# Altium PCB HomeLight_230722.PcbDoc
Units mil, origin at the board's own origin, x right, y up, seen from the top; angles counter-clockwise.
Board outline 3937.01 x 3937.01 mil, 2 copper layers (Top Layer, Bottom Layer); 110 components, 111 nets, 393 pads, 222 vias.
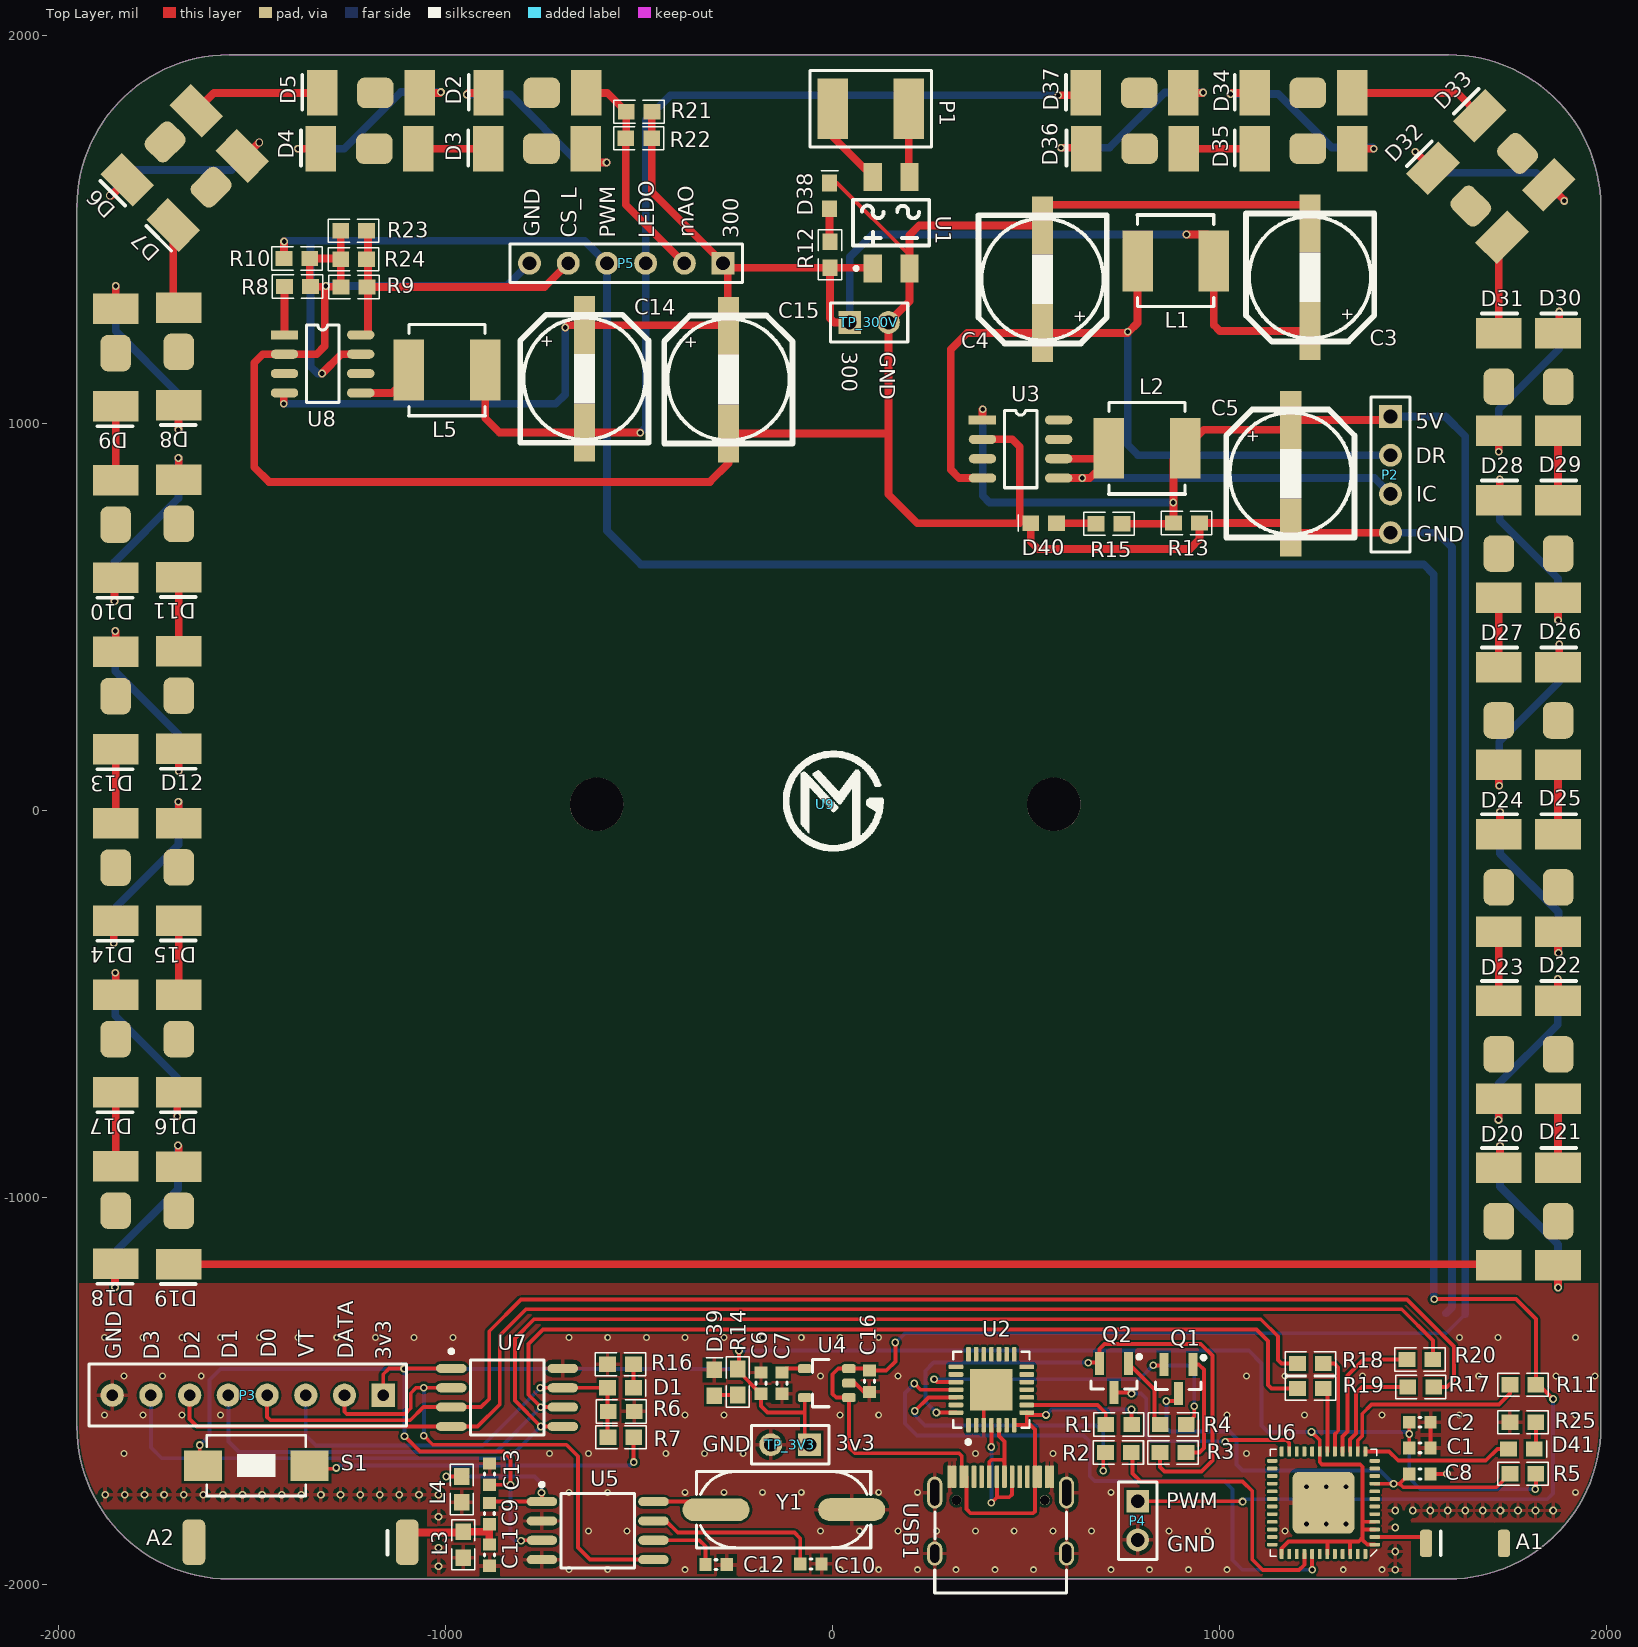
[diagram p0: Top Layer view]
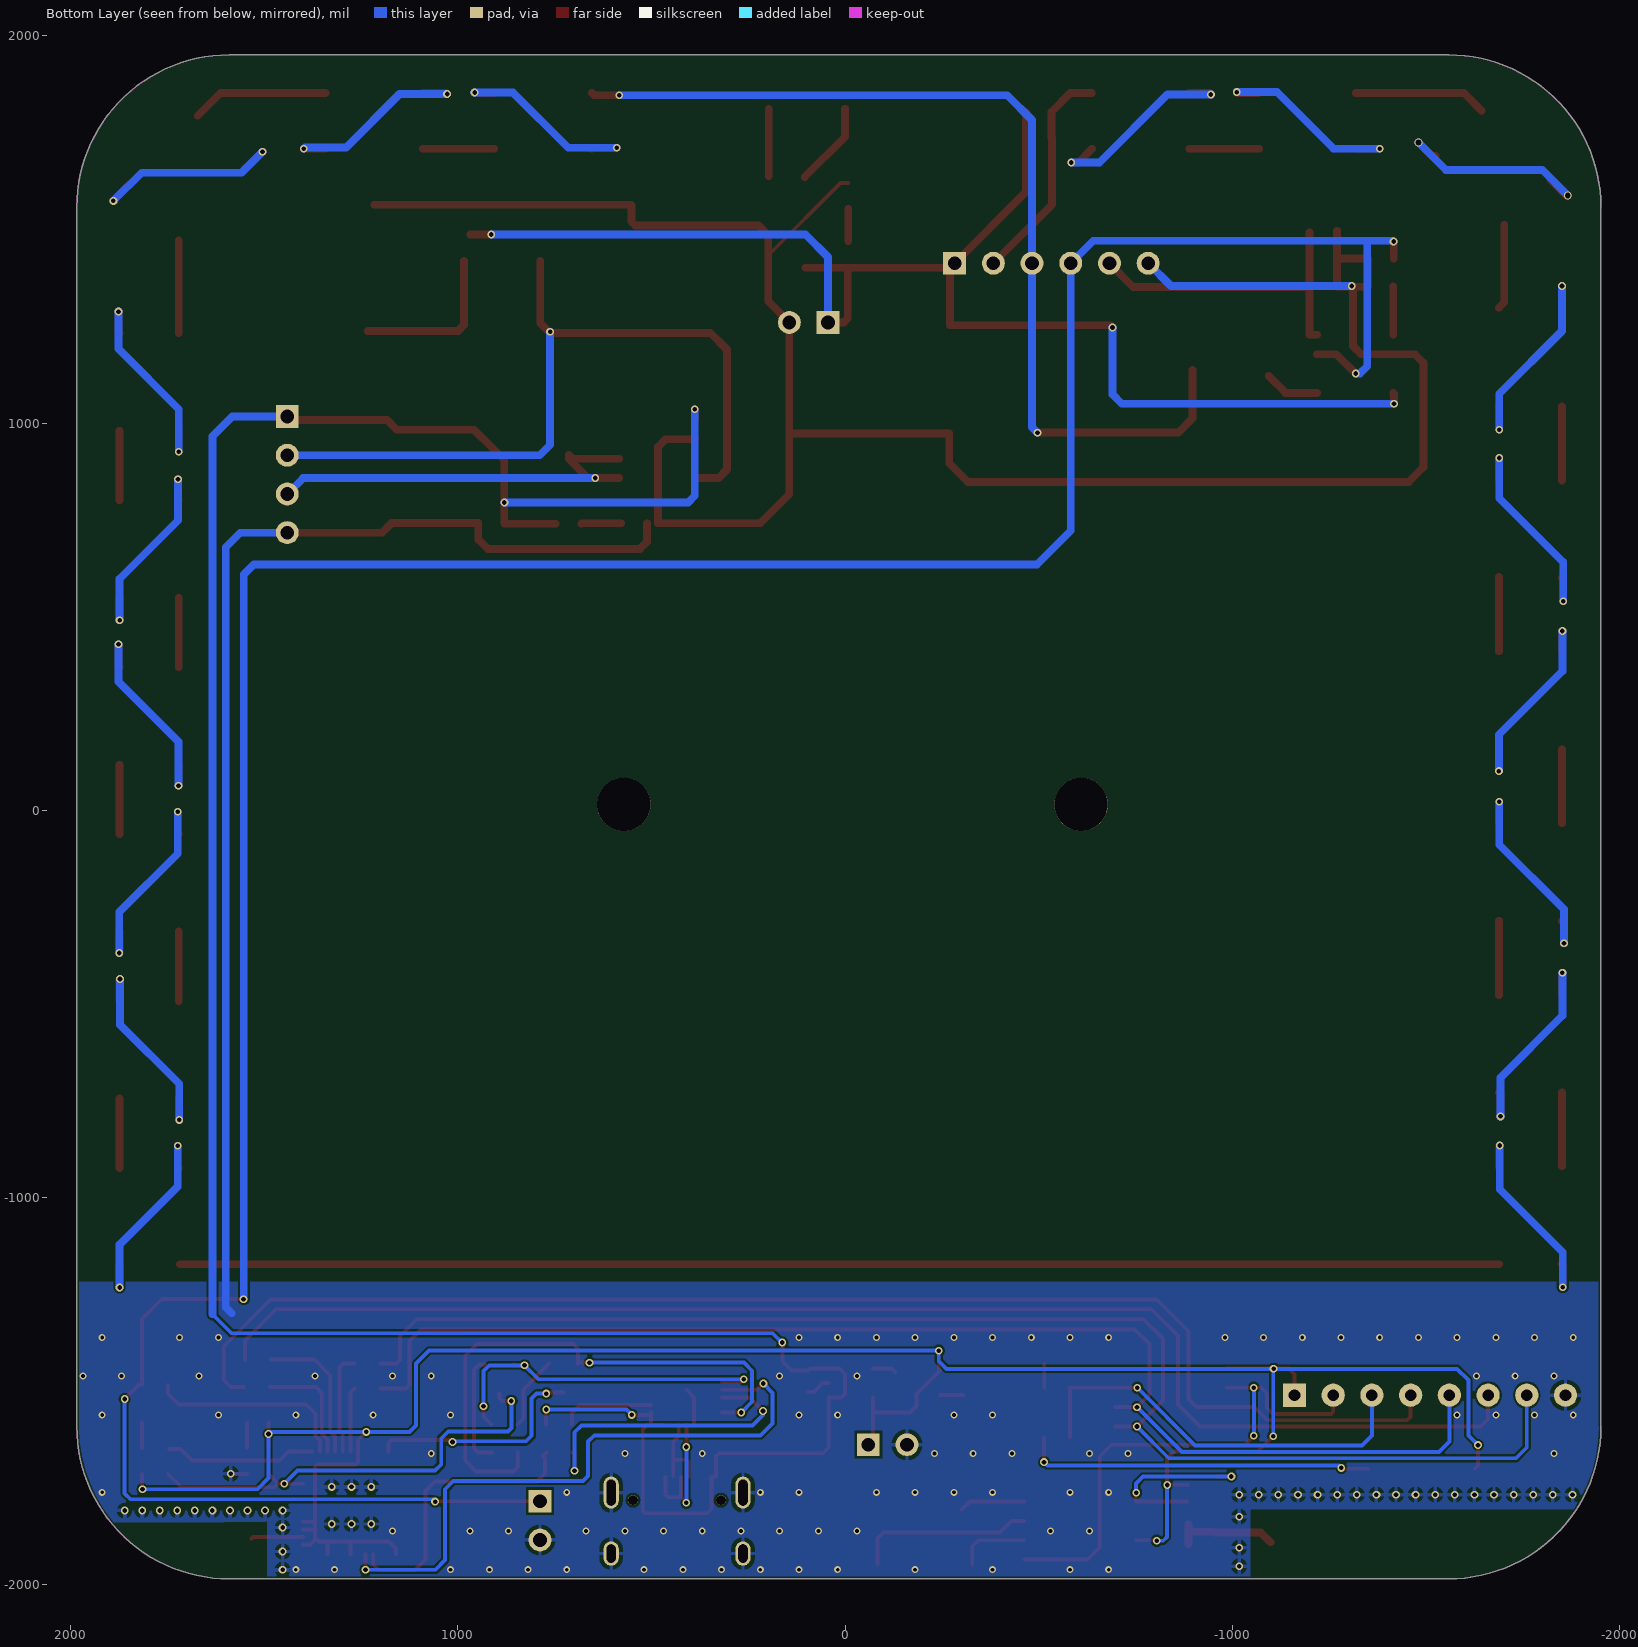
[diagram p1: Bottom Layer view, seen from below]

## Layer stack, top to bottom
Top Solder: solder mask 0.4, Solder Resist, Dk 3.5
Top Layer: signal copper 1.4
Dielectric 1: dielectric 12.6, FR-4, Dk 4.8
Bottom Layer: signal copper 1.4
Bottom Solder: solder mask 0.4, Solder Resist, Dk 3.5

## Board outline
-1952.47,-1591.98 -1952.47,1557.63 cw(c-1558.77,1557.63) -1558.77,1951.33 1590.84,1951.33 cw(c1590.84,1557.63) 1984.54,1557.63 1984.54,-1591.98 cw(c1590.84,-1591.98) 1590.84,-1985.68 -1558.77,-1985.68 cw(c-1558.77,-1591.98)

## Design rules (kind name [scope] priority, off if disabled: settings)
Clearance [All] p1: gap=6
MinimumSolderMaskSliver [All] p1: minsoldermaskwidth=4
PolygonConnect [All] p1: connectstyle=Relief reliefconductorwidth=10 reliefentries=4 polygonreliefangle="90 Angle" airgapwidth=10
RoutingVias [All] p1: holewidth=12 width=20 viastyle="Through Hole" minholewidth=8 minwidth=16 maxholewidth=28 maxwidth=50
SilkToSolderMaskClearance [IsPad] p1: minsilkscreentomaskgap=0 clearancetoexposedcopper=TRUE
SolderMaskExpansion [All] p1: expansion=4
Width [All] p1: maxlimit=100 minlimit=4 preferedwidth=10
27 further rules are at their usual default settings.

## Components (designator, comment, footprint, x,y, rotation, side; value= is the part's Value field where it differs from the comment)
A1 "ANT" ANT5020R2400 1633,-1894 r0 top
A2 "ANT" ANT15030R433 -1099,-1891 r180 top
C1 "10uF" 0603-2 1517,-1647 r180 top
C2 "0.1uF" 0603-2 1517,-1581 r180 top
C3 "Cap Pol" SMD-EC-F8 1233,1238 r90 top
C4 "Cap Pol" SMD-EC-F8 542,1233 r90 top
C5 "Cap Pol" SMD-EC-F8 1183,1008 r270 top
C6 "10uF" 0603-2 -185,-1480 r270 top
C7 "10nF" 0603-2 -131,-1480 r90 top
C8 "1uF" 0603-2 1517,-1715 r0 top
C9 "Cap" 0603-2 -887,-1817 r90 top
C10 "Cap" 0603-2 -56,-1947 r180 top
C11 "Cap" 0603-2 -886,-1924 r270 top
C12 "Cap" 0603-2 -301,-1949 r180 top
C13 "Cap" 0603-2 -886,-1715 r90 top
C14 "Cap Pol" SMD-EC-F8 -641,1253 r270 top
C15 "Cap Pol" SMD-EC-F8 -269,1251 r270 top
C16 "Cap" 0603-2 95,-1475 r270 top
D1 "LED0" LED_0603 -548,-1492 r0 top
D2 "LED0" LED-5730 -763,1853 r180 top
D3 "LED0" LED-5730 -764,1709 r180 top
D4 "LED0" LED-5730 -1196,1709 r180 top
D5 "LED0" LED-5730 -1193,1853 r180 top
D6 "LED0" LED-5730 -1733,1718 r225 top
D7 "LED0" LED-5730 -1614,1601 r225 top
D8 "LED0" LED-5730 -1689,1172 r270 top
D9 "LED0" LED-5730 -1852,1169 r270 top
D10 "LED0" LED-5730 -1852,726 r270 top
D11 "LED0" LED-5730 -1689,728.2 r270 top
D12 "LED0" LED-5730 -1689,284.4 r270 top
D13 "LED0" LED-5730 -1852,283 r270 top
D14 "LED0" LED-5730 -1852,-160 r270 top
D15 "LED0" LED-5730 -1689,-159.4 r270 top
D16 "LED0" LED-5730 -1689,-603.2 r270 top
D17 "LED0" LED-5730 -1852,-603 r270 top
D18 "LED0" LED-5730 -1852,-1046 r270 top
D19 "LED0" LED-5730 -1689,-1047 r270 top
D20 "LED0" LED-5730 1721,-1050 r90 top
D21 "LED0" LED-5730 1874,-1050 r90 top
D22 "LED0" LED-5730 1874,-618.8 r90 top
D23 "LED0" LED-5730 1721,-618.8 r90 top
D24 "LED0" LED-5730 1721,-187.6 r90 top
D25 "LED0" LED-5730 1874,-187.6 r90 top
D26 "LED0" LED-5730 1874,243.6 r90 top
D27 "LED0" LED-5730 1721,243.6 r90 top
D28 "LED0" LED-5730 1721,674.8 r90 top
D29 "LED0" LED-5730 1874,674.8 r90 top
D30 "LED0" LED-5730 1874,1106 r90 top
D31 "LED0" LED-5730 1721,1106 r90 top
D32 "LED0" LED-5730 1640,1569 r135 top
D33 "LED0" LED-5730 1761,1705 r135 top
D34 "LED0" LED-5730 1216,1853 r180 top
D35 "LED0" LED-5730 1216,1709 r180 top
D36 "LED0" LED-5730 781,1709 r180 top
D37 "LED0" LED-5730 780,1853 r180 top
D38 "LED0" LED_0603 -8,1587 r90 top
D39 "LED0" LED_0603 -306,-1479 r90 top
D40 "LED0" LED_0603 545,741 r180 top
D41 "LED0" LED_0603 1779.07,-1650 r0 top
L1 "Inductor" CD54 886,1419 r180 top
L2 "Inductor" CD54 812,935 r0 top
L3 "Inductor" 0603-1 -954,-1897.46 r90 top
L4 "Inductor" 0603-1 -958,-1754.46 r90 top
L5 "Inductor" CD54 -996,1137 r0 top
P1 "Header 2" HDR2X1_焊接版 0,1812 r0 top
P2 "Header 4" HDR4X1_2.54 1441,1017 r270 top
P3 "Header 8" HDR8X1_2.54 -1161,-1511 r180 top
P4 "Header 2" HDR2X1_2.54 788,-1785 r270 top
P5 "Header 6" HDR6X1_2.54 -283,1413 r180 top
Q1 "S8050" SOT-23 893,-1469 r270 top
Q2 "S8050" SOT-23 727,-1467 r270 top
R1 "10K" 0603-1 739,-1587 r180 top
R2 "200R" 0603-1 738,-1659 r180 top
R3 "12K" 0603-1 879,-1659 r0 top
R4 "12K" 0603-1 880,-1587 r180 top
R5 "10K" 0603-1 1783,-1714 r180 top
R6 "Res1" 0603-1 -546,-1553 r0 top
R7 "Res1" 0603-1 -547,-1620 r180 top
R8 "Res1" 0603-1 -1382.46,1353 r180 top
R9 "Res1" 0603-1 -1236.42,1351.39 r0 top
R10 "Res1" 0603-1 -1384,1425 r180 top
R11 "Res1" 0603-1 1783,-1484 r180 top
R12 "12K" 0603-1 -7,1435 r270 top
R13 "12K" 0603-1 914,742 r0 top
R14 "12K" 0603-1 -245,-1477 r90 top
R15 "12K" 0603-1 714,740 r0 top
R16 "Res1" 0603-1 -548,-1431 r180 top
R17 "Res1" 0603-1 1519,-1490 r0 top
R18 "Res1" 0603-1 1234,-1429 r180 top
R19 "Res1" 0603-1 1234,-1494 r180 top
R20 "Res1" 0603-1 1517,-1419 r0 top
R21 "Res1" 0603-1 -500,1804 r0 top
R22 "Res1" 0603-1 -501,1736 r0 top
R23 "Res1" 0603-1 -1237.46,1497 r0 top
R24 "Res1" 0603-1 -1237.46,1423 r0 top
R25 "Res1" 0603-1 1783,-1581 r0 top
S1 "SW-PB" SW_PB2_A1 -1491,-1693 r270 top
TP_3V3 "Header 2" HDR2X1_2.54 -60,-1639 r180 top
TP_300V "Header 2" HDR2X1_2.54 44,1260 r0 top
U1 "MBXS" MBXS 103.93,1399.76 r90 top
U2 "CP2102" QFN-28 410,-1497 r90 top
U3 "BP85226D" BP85226-BP2881 387,1008 r0 top
U4 "ME6211C33" SOT23-5 -17,-1480 r180 top
U5 "RF211A" SOIC-8 -607,-1861 r0 top
U6 "ESP32_SIP" QFN-48_7X7 1268,-1789 r180 top
U7 "RF211A_MCU05" SOIC-8 -841,-1517 r0 top
U8 "BP2881X" BP85226-BP2881 -1416,1228 r0 top
U9 "logo_MXJ" logo_MXJ -19,15 r0 top locked
USB1 "Type-C" Type-C-TOP 434,-1821 r270 top
Y1 "XTAL" X-SM49 -126,-1807 r180 top

## Footprints (in the part's own frame and the unit in brackets; to place one, negate y for a bottom-side part, rotate by r counter-clockwise, add the part's x,y. Pads: shape width x height; smd on the part's side, far side on the other; paste and mask are expansions set on the pad)
0603-1 [mm] "贴片带丝印"
  rect 1.1x1 smd: 1(-0.85,0) 2(0.85,0)
  silkscreen extent -1.65,-0.76 1.65,0.76, body extent -1.14,-0.38 1.14,0.38, height 1
0603-2 [mm] "贴片无丝印"
  rect 0.8x0.85 smd: 1(-0.7,0) 2(0.7,0)
  silkscreen extent -0.07,-0.33 0.07,0.33, body extent -0.87,-0.47 0.87,0.47, height 0.85
ANT5020R2400 [mm] "5x2mm,2.4G陶瓷天线"
  rrect50% 0.8x1.8 smd: 1(-2.54,0) ""(2.563,0)
  silkscreen extent -1.57,-0.76 -1.57,0.79, body extent -2.57,-0.91 2.54,0.94, height 1.32
ANT15030R433 [mm] "15x3mm,433M陶瓷天线"
  rrect50% 1.5x3 smd: 1(0,0) ""(14,0)
  silkscreen extent 1.3,-0.75 1.3,0.8
BP85226-BP2881 [mm]
  rect 1.8x0.6 smd: 1(0,0)
  oval 1.8x0.6 smd: 2(0,-1.27) 3(0,-2.54) 4(0,-3.81) 5(5,-3.81) 6(5,-2.54) 7(5,-1.27) 8(5,0)
  silkscreen extent 1.43,-4.44 3.57,0.64
CD54 [mm] "电感封装"
  rect 2x4 smd: 1(-2.5,0) 2(2.5,0)
  silkscreen extent -2.5,-3 2.5,3
HDR2X1_2.54 [mm] "Connector; Header; 2 Position; 2.54mm"
  rect 1.5x1.5 hole 0.9: 1(0,0)
  round 1.5 hole 0.9: 2(2.54,0)
  silkscreen extent -1.27,-1.27 3.81,1.27
HDR2X1_焊接版 [mm] "用于焊接裸露导线"
  rect 2x4 smd: 1(0,0) 2(5,0)
  silkscreen extent -1.5,-2.5 6.5,2.5
HDR4X1_2.54 [mm] "Connector; Header; 4 Position"
  rect 1.5x1.5 hole 0.9: 1(0,0)
  round 1.5 hole 0.9: 2(2.54,0) 3(5.08,0) 4(7.62,0)
  silkscreen extent -1.27,-1.27 8.89,1.27
HDR6X1_2.54 [mm] "Connector; Header; 4 Position"
  rect 1.5x1.5 hole 0.9: 1(0,0)
  round 1.5 hole 0.9: 2(2.54,0) 3(5.08,0) 4(7.62,0) 5(10.16,0) 6(12.7,0)
  silkscreen extent -1.27,-1.27 13.97,1.27
HDR8X1_2.54 [mil]
  rect 60x60 hole 30: 1(0,0)
  round 60 hole 30: 2(100,0) 3(200,0) 4(300,0) 5(400,0) 6(500,0) 7(600,0) 8(700,0)
  silkscreen extent -60,-80 760,80
LED-5730 [mm] "贴片二极管"
  rrect50% 2.4x2 smd: 0(-0.3,0)
  rect 2x3 smd: 1(-3.2,0) 2(3.2,0)
  silkscreen extent 4.5,-1.19 4.5,1.1
LED_0603 [mm] "带丝印层"
  rect 1.1x1 smd: 1(-0.85,0) 2(0.85,0)
  silkscreen extent 1.65,-0.56 1.65,0.53, body extent -1.14,-0.38 1.14,0.38, height 1
logo_MXJ [mil] "直径16mm"
  silkscreen extent -109,-120 151,139
MBXS [mm] "整流桥MB1S-MB10S"
  rect 1.84x1.2 smd: 1(0,0) 2(0,-2.4) 3(6,-2.4) 4(6,0)
  silkscreen extent -0.1,-3.7 4.5,1.3
QFN-28 [mil]
  rrect50% 38x12 smd mask+5: 1(-91.5,59.06) 2(-91.5,39.37) 3(-91.5,19.69) 4(-91.5,0) 5(-91.5,-19.68) 6(-91.5,-39.37) 7(-91.5,-59.06) 15(91.5,-59.06) 16(91.5,-39.37) 17(91.5,-19.68) 18(91.5,0) 19(91.5,19.69) 20(91.5,39.37) 21(91.5,59.06)
  rrect50% 12x38 smd mask+5: 8(-59.06,-91.5) 9(-39.37,-91.5) 10(-19.68,-91.5) 11(0,-91.5) 12(19.69,-91.5) 13(39.37,-91.5) 14(59.06,-91.5) 22(59.06,91.5) 23(39.37,91.5) 24(19.69,91.5) 25(0,91.5) 26(-19.68,91.5) 27(-39.37,91.5) 28(-59.06,91.5)
  rect 106.3x110.24 smd: 29(0,0)
  silkscreen extent -140,-98 98,98, body extent -98,-98 98,98, height 35
QFN-48_7X7 [mm]
  rrect20% 4.064x4.064 smd: 0(0,0)
  rrect50% 0.675x0.25 smd: 1(-3.363,2.75) 2(-3.363,2.25) 3(-3.363,1.75) 4(-3.363,1.25) 5(-3.363,0.75) 6(-3.363,0.25) 7(-3.363,-0.25) 8(-3.363,-0.75) 9(-3.363,-1.25) 10(-3.363,-1.75) 11(-3.363,-2.25) 12(-3.363,-2.75) 25(3.363,-2.75) 26(3.363,-2.25) 27(3.363,-1.75) 28(3.363,-1.25) 29(3.363,-0.75) 30(3.363,-0.25) 31(3.363,0.25) 32(3.363,0.75) 33(3.363,1.25) 34(3.363,1.75) 35(3.363,2.25) 36(3.363,2.75)
  rrect50% 0.25x0.675 smd: 13(-2.75,-3.363) 14(-2.25,-3.363) 15(-1.75,-3.363) 16(-1.25,-3.363) 17(-0.75,-3.363) 18(-0.25,-3.363) 19(0.25,-3.363) 20(0.75,-3.363) 21(1.25,-3.363) 22(1.75,-3.363) 23(2.25,-3.363) 24(2.75,-3.363) 37(2.75,3.363) 38(2.25,3.363) 39(1.75,3.363) 40(1.25,3.363) 41(0.75,3.363) 42(0.25,3.363) 43(-0.25,3.363) 44(-0.75,3.363) 45(-1.25,3.363) 46(-1.75,3.363) 47(-2.25,3.363) 48(-2.75,3.363)
  silkscreen extent -3.5,-3.5 3.5,3.5, body extent -3.5,-3.5 3.5,3.5, height 1
SMD-EC-F8 [mm]
  rect 3.8x1.4 smd: 1(0,0) 2(7.051,0)
  silkscreen extent -0.69,-4.22 7.71,4.2
SOIC-8 [mm]
  oval 2x0.6 smd: 1(-3.658,1.905) 2(-3.658,0.635) 3(-3.658,-0.635) 4(-3.658,-1.905) 5(3.658,-1.905) 6(3.658,-0.635) 7(3.658,0.635) 8(3.658,1.905)
  silkscreen extent -3.78,-2.45 2.41,3.15
SOT23-5 [mm] "SOT23, 3-Leads, Body 3.1x3.0mm (max), Pitch 0.95mm, IPC Medium Density"
  rrect50% 0.889x0.6 smd: 1(-1.5,0.95) 2(-1.5,0) 3(-1.5,-0.95) 4(1.396,-0.95) 5(1.396,0.95)
  silkscreen extent -0.2,-1.55 0.9,1.55, body extent -1.48,-1.45 1.32,1.45, height 1.2
SOT-23 [mm]
  rect 1.5x0.6 smd: 1(-0.95,0.95) 2(-0.95,-0.95) 3(0.95,0)
  silkscreen extent -1.52,-1.5 0.7,1.78, body extent -1.16,-1.45 1.21,1.45, height 1
SW_PB2_A1 [mm] "实验室常用复位开关，白色"
  rect 2x2.5 smd: 1(0,3.556) 2(0,-3.444)
  silkscreen extent -2,-3.19 2,3.31, body extent -2.03,-3.18 2.03,3.3, height 1.2
Type-C-TOP [mm]
  round 0.65 hole 0.65: 0(-0.98,2.89) 0(-0.98,-2.89)
  oval 1.6x1 hole 0.6 slot 1.2 at 0 deg: 1(2.52,4.325) 2(2.52,-4.325)
  oval 2.1x1 hole 0.6 slot 1.7 at 0 deg: 3(-1.48,-4.325) 4(-1.48,4.325)
  rrect50% 1.5x0.3 smd: A1(-2.52,-3.35) A4(-2.52,-2.55) A5(-2.52,-1.25) A6(-2.52,-0.25) A7(-2.52,0.25) A8(-2.52,1.25) A9(-2.52,2.55) A12(-2.52,3.35) B1(-2.52,3.05) B4(-2.52,2.25) B5(-2.52,1.75) B6(-2.52,0.75) B7(-2.52,-0.75) B8(-2.52,-1.75) B9(-2.52,-2.25) B12(-2.52,-3.05)
  silkscreen extent -0.22,-4.33 5.12,4.33, body extent -2.57,-4.48 5.18,4.48, height 3.26
X-SM49 [mm] "贴片晶振"
  oval 4.4x1.5 smd: 1(4.45,0.004) 2(-4.45,-0.004)
  silkscreen extent -5.7,-2.5 5.72,2.5

## Part data
C1 C2 C6 C7 C8: library part Cap, "无极性电容"
C3 C4 C5 C14 C15: "极性电解电容"
C9 C10 C11 C12 C13 C16: "无极性电容"
D1 D2 D3 D4 D5 D6 D7 D8 D9 D10 D11 D12 D13 D14 D15 D16 D17 D18 D19 D20 D21 D22 D23 D24 D25 D26 D27 D28 D29 D30 D31 D32 D33 D34 D35 D36 D37 D38 D39 D40 D41: "发光二极管"
L1 L2 L3 L4 L5: "电感"
P1 P2 P4 P5 TP_3V3 TP_300V: "接插件"
P3: "Header, 8-Pin"
Q1 Q2: library part Triode-NPN, "NPN三极管"
R1 R2 R3 R4 R5 R12 R13 R14 R15: library part Res1, "贴片电阻"
R6 R7 R8 R9 R10 R11 R16 R17 R18 R19 R20 R21 R22 R23 R24 R25: "贴片电阻"
S1: "微动开关"
U1: "整流桥"
U2: "USBתTTL"
U3: library part BP85226, "开关电源驱动芯片"
U4: library part LP2992, "LDO"
U5: "315M无线接收芯片"
U6: library part ESP32-PICO
U7: "无线接收芯片的解码芯片"
U8: "PWM调光非隔离降压型LED恒流驱动芯片"
USB1: library part USB-Type-C-TOP
Y1: "晶振"

## Free pads (board coordinates)
  round 137.8 hole 137.8: 1(-609.55,15) 2(571.55,15)

## Via types
v1: diameter 20, hole 12, Top Layer to Bottom Layer, 126 vias
v2: diameter 18, hole 10, Top Layer to Bottom Layer, 94 vias
v3: diameter 20, hole 15, Top Layer to Bottom Layer, 2 vias

## Nets (pads, with @x,y where several pads share a name; then routed paths per layer and width w, separated by ;. In a path a pad name is that pad's centre, name@x,y a point inside that pad or via, vN(x,y) a via of type N, cw(c..) or ccw(c..) an arc to the next point about the centre after c; other vN are vias at no path point)
3V3: C1.2 C2.2 C6.2 C13.1 P3.1 R5.1 R14.2 S1.2 TP_3V3.1 U4.5 U5.3 U6.1 U6.3 U6.4 U6.19 U6.37 U6.43 U6.46 U7.1 | length 6382.3
  Top Layer w10: v1(-1635,-1640) -1635,-1692.59 S1.2@-1626.59,-1701 ; P3.1 -1161,-1457 -1146,-1442 U7.1 ; v1(-1106,-1617) -1066,-1657 -850,-1657 -832,-1675 v1(-832,-1743) -832.44,-1742.56 C13.1 ; v1(-805,-1887) -804,-1886 U5.3 ; v1(-242,-1396) -242,-1444.56 -245,-1447.56 C6.2 -185,-1539 -168,-1556 -71.94,-1556 ; U4.5 -71.94,-1556 ; TP_3V3.1 -71.94,-1627.06 -71.94,-1556 ; U6.37 1159.91,-1921.21 1159.91,-1907.09 1178,-1889 1359,-1889 1369,-1879 ; v1(1237,-1606) 1258.16,-1627.16 U6.19 1258.16,-1684.16 1264,-1690 1363,-1690 1369,-1696 1369,-1879 ; U6.43 1277.84,-1891 ; U6.46 1336.9,-1891 ; 1369.21,-1838.21 U6.4 ; 1369.9,-1857.9 U6.3 ; U6.1 1400.21,-1897.09 1381.09,-1897.09 1369,-1885 1369,-1879 ; C1.2 v1(1489.44,-1611.44) C2.2 ; v1(1815,-1754) 1816.46,-1752.54 R5.1
  Bottom Layer w10: v1(-1635,-1640) -1610,-1615 -1610,-1472 -1581,-1443 v1(-1107,-1443) ; v1(-1106,-1617) -1106,-1444 v1(-1107,-1443) ; v1(-832,-1743) -832,-1877 -822,-1887 v1(-805,-1887) ; v1(1815,-1754) 1518,-1754 1489.44,-1725.44 v1(1489.44,-1611.44) 1484,-1606 v1(1237,-1606) 1125,-1606 1108,-1589 1108,-1429 1075,-1396 v1(-242,-1396) -242,-1423 -262,-1443 v1(-1107,-1443)
300V: C3.1 C14.1 C15.1 L1.1 P5.1 R12.2 R21.2 R22.2 TP_300V.1 U1.1 U8.4 | length 4089.9
  Top Layer w20: v1(-1418,1050) -1418,1076 U8.4 ; v1(-691,1247) -685,1253 C14.1 -271,1253 -271,1401 P5.1@-271.54,1401.54 ; R21.2@-467.54,1803 R22.2 -467.54,1597.54 P5.1 P5.1@-271.54,1401.54 ; TP_300V.1 4,1260 -7,1271 R12.2 ; U1.1@102.16,1401.54 R12.2 ; v1(914,1487) L1.1@968,1487 ; L1.1 984.43,1253.57 1000,1238 C3.1 ; P5.1@-271.54,1401.54 R12.2
  Bottom Layer w20: v1(-1418,1050) -715,1050 -691,1074 v1(-691,1247) ; TP_300V.1 44,1429 102,1487 v1(914,1487)
CP_RX: U2.25 U6.41 | length 1635.8
  Top Layer w10: v1(211,-1481) 227,-1497 U2.25 ; U6.41 1238.47,-1961.47 v1(1239,-1962)
  Bottom Layer w10: v1(211,-1481) 187,-1505 187,-1584 218,-1615 648,-1615 664,-1631 664,-1720 677,-1733 1012,-1733 1033,-1754 1033,-1937 1058,-1962 v1(1239,-1962)
CP_TX: R2.1 U6.40 | length 745
  Top Layer w10: R2.1 781,-1668.54 775,-1674.54 775,-1713 796,-1734 1059,-1734 1084,-1759 1084,-1936 1111,-1963 1205,-1963 1218.79,-1949.21 U6.40
CS_LED: P5.5 R9.2 R23.2 R24.2 U8.8 | length 826.7
  Top Layer w20: U8.8 -1200,1228 R9.2@-1200,1351.39 ; R23.2@-1200,1493 R9.2@-1200,1351.39 ; P5.5 -744.61,1351.39 R9.2@-1200,1351.39
DRAIN: C4.1 L1.2 P2.2 U3.4 | length 2052.6
  Top Layer w20: U3.4 327,858 305,880 305,1190 348,1233 C4.1 v1@762,1233 ; v1@763.5,1234.5 787.57,1258.57 L1.2
  Bottom Layer w20: v1(762,1236) 762,944 789,917 P2.2
DTR: Q2.2 R3.1 U2.28 | length 1437
  Top Layer w10: v1(268,-1556) v1(268,-1556) U2.28 ; v1(660,-1427) 687,-1427 Q2.2 689.6,-1391.4 702,-1379 951,-1379 981,-1409 981,-1680 953,-1708 857,-1708 845.54,-1696.54 R3.1
  Bottom Layer w10: v1(268,-1556) 240,-1528 240,-1448 261,-1427 v1(660,-1427)
EN: C8.1 Q1.3 R5.2 U6.9 | length 1206.7
  Top Layer w10: v1(862,-1526) 886,-1526 893,-1519 Q1.3 ; U6.9 1464.65,-1739.79 ; C8.1@1488.44,-1714 C8.1 1464.65,-1739.79 ; R5.2 1714.54,-1749 1473.87,-1749 1464.65,-1739.79
  Bottom Layer w10: v1(862,-1526) 862,-1596 871,-1605 1025,-1605 1043,-1623 1043,-1690 1059,-1706 1414,-1706 v1@1449,-1741
  other v1: 1449,-1739.79
FLASH_CLK: U6.31
FLASH_CS: U6.25
FLASH_SD0: U6.27
FLASH_SD1: U6.33
FLASH_SD2: U6.30
FLASH_SD3: U6.32
GND: C1.1 C2.1 C3.2 C4.2 C5.2 C6.1 C7.1 C8.2 C10.1 C11.2 C12.1 C13.2 C15.2 C16.2 D38.2 D39.2 D40.2 L3.1 L4.1 P2.4 P3.8 P4.2 P5.6 R6.2 R8.1 R9.1 R10.1 R13.2 R16.2 R23.1 R24.1 R25.1 TP_3V3.2 TP_300V.2 U1.2 U2.3 U2.29 U3.2 U4.2 U5.2 U5.4 U6.0 U7.8 U8.2 USB1.1 USB1.2 USB1.3 USB1.4 USB1.A1 USB1.A12 USB1.B1 USB1.B12 Y1.2 | length 9490.1
  Top Layer w10: D38.2 11.54,1620.46 197,1435 U1.2@198.42,1435 ; U4.2 58,-1480 80.56,-1502.56 C16.2 ; U2.3 390.31,-1516.68 U2.29 ; C8.2 v1@1586,-1715 ; C1.1 C2.1
  Top Layer w20: v1@-1309,1352.43 -1270.93,1352.43 R24.1 R23.1 ; R24.1@-1272.93,1425 R10.1 -1350.54,1354.54 R8.1 -1348.43,1352.43 -1312,1352.43 -1312,1199 -1333,1178 U8.2 -1472,1178 -1494,1156 -1494,886 -1456,848 -317,848 -269,896 C15.2 140.41,973.41 ; U3.2 464,958 483,939 483,741 219,741 144,816 TP_300V.2 198.42,1314.42 U1.2 198.42,1435 198.42,1485.42 223.59,1510.59 C4.2 552,1520.59 552,1563 553,1564 C3.2@1216,1564 ; D40.2 511.54,693.46 530,675 923,675 947.46,699.46 R13.2 1171.41,742 C5.2 1196.41,717 P2.4
  Bottom Layer w20: v1(-1309,1354) -842,1354 P5.6 ; P2.4 1562,717 1600,679 1600,-1284 1584.5,-1299.5
  other v1: 1453,-1962 -1018,-1953 1453,-1915 -1018,-1905 1453,-1853 1224,-1844 1275,-1844 1326,-1844 -1018,-1825 1453,-1809 1498.33,-1809 1543.67,-1809 1589,-1809 1634.33,-1809 1679.67,-1809 1725,-1809 1770.33,-1809 1815.67,-1809 1861,-1809 -1879,-1768 -1828.35,-1768 -1777.71,-1768 -1727.06,-1768 -1676.41,-1768 -1625.77,-1768 -1575.12,-1768 -1524.47,-1768 -1473.82,-1768 -1423.18,-1768 -1372.53,-1768 -1321.88,-1768 -1271.24,-1768 -1220.59,-1768 -1169.94,-1768 -1119.3,-1768 -1068.65,-1768 -1018,-1768 1224,-1748 1275,-1748 1326,-1748 1587,-1714
  other v2: -681.06,-1961.94 -581.06,-1961.94 -381.06,-1961.94 -181.06,-1961.94 18.94,-1961.94 118.94,-1961.94 218.94,-1961.94 318.94,-1961.94 418.94,-1961.94 518.94,-1961.94 718.94,-1961.94 818.94,-1961.94 918.94,-1961.94 1018.94,-1961.94 1318.94,-1961.94 1418.94,-1961.94 -631.06,-1861.94 -531.06,-1861.94 -31.06,-1861.94 68.94,-1861.94 168.94,-1861.94 268.94,-1861.94 368.94,-1861.94 468.94,-1861.94 568.94,-1861.94 668.94,-1861.94 868.94,-1861.94 968.94,-1861.94 1168.94,-1861.94 -681.06,-1761.94 -581.06,-1761.94 -381.06,-1761.94 -281.06,-1761.94 -181.06,-1761.94 -81.06,-1761.94 118.94,-1761.94 218.94,-1761.94 718.94,-1761.94 1918.94,-1761.94 -1831.06,-1661.94 -731.06,-1661.94 -631.06,-1661.94 -431.06,-1661.94 -331.06,-1661.94 -231.06,-1661.94 368.94,-1661.94 568.94,-1661.94 1068.94,-1661.94 -1881.06,-1561.94 -1781.06,-1561.94 -1681.06,-1561.94 -1581.06,-1561.94 -381.06,-1561.94 -281.06,-1561.94 18.94,-1561.94 118.94,-1561.94 1018.94,-1561.94 1218.94,-1561.94 1418.94,-1561.94 1618.94,-1561.94 1918.94,-1561.94 -1831.06,-1461.94 -1731.06,-1461.94 -1631.06,-1461.94 -31.06,-1461.94 168.94,-1461.94 1068.94,-1461.94 1168.94,-1461.94 1368.94,-1461.94 1668.94,-1461.94 1868.94,-1461.94 1968.94,-1461.94 -1881.06,-1361.94 -1781.06,-1361.94 -1681.06,-1361.94 -1581.06,-1361.94 -1481.06,-1361.94 -1381.06,-1361.94 -1281.06,-1361.94 -1181.06,-1361.94 -1081.06,-1361.94 -981.06,-1361.94 -681.06,-1361.94 -581.06,-1361.94 -481.06,-1361.94 -381.06,-1361.94 -281.06,-1361.94 -181.06,-1361.94 -81.06,-1361.94 18.94,-1361.94 118.94,-1361.94 1618.94,-1361.94 1718.94,-1361.94 1918.94,-1361.94
GPIO0: Q2.3 U6.23 | length 588.8
  Top Layer w10: Q2.3 769.4,-1504.4 v1(772,-1507) ; v1(1014,-1632) 1019,-1627 1172,-1627 1179.42,-1634.42 U6.23
  Bottom Layer w10: v1(772,-1507) 797,-1507 810,-1520 810,-1616 824,-1630 1012,-1630 v1(1014,-1632)
GPIO2: U6.22
GPIO4: U6.24
GPIO5: U6.34
GPIO9: U6.28
GPIO10: U6.29
GPIO12: R19.1 U6.18 | length 167
  Top Layer w10: R19.1 1278,-1504.54 1278,-1656.46 U6.18
GPIO13: U6.20
GPIO14: R18.1 U6.17 | length 263.8
  Top Layer w10: R18.1 1296,-1429 1306,-1439 1306,-1603 1297.53,-1611.47 U6.17
GPIO15: U6.21
GPIO18: U6.35
GPIO19: U6.38
GPIO21: U6.42
GPIO22: U6.39
GPIO23: U6.36
GPIO25: R11.2 U6.14 | length 528.1
  Top Layer w10: U6.14 1356.58,-1628.04 1368,-1616.63 1368,-1559 1392,-1535 1721,-1535 1749.54,-1506.46 R11.2
GPIO26: R17.1 U6.15 | length 297.6
  Top Layer w10: U6.15 1336.9,-1625.1 1352,-1610 1352,-1505 1367,-1490 R17.1
GPIO27: R20.1 U6.16 | length 372.4
  Top Layer w10: U6.16 1317.21,-1617.79 1330,-1605 1330,-1460 1371,-1419 R20.1
GPIO32: U6.12
GPIO33: D41.1 U6.13 | length 391.5
  Top Layer w10: U6.13 1437.62,-1656.62 1461,-1680 1687,-1680 1717,-1650 D41.1
GPIO34: U6.10
GPIO35: U6.11
GPIO37: U6.6
GPIO38: U6.7
IC_GND: L2.1 P2.3 U3.5 U3.6 | length 1107.5
  Top Layer w20: U3.5 v1(645,858) 664,858 713.57,907.57 713.57,918 703.57,908 U3.6
  Bottom Layer w20: v1(645,858) 1400,858 P2.3
LED_MA: D2.1 P5.2 R21.1 R22.1 | length 576.6
  Top Layer w20: D2.1 -582.46,1853 R21.1 R22.1@-533.46,1737 ; R22.1 -534.46,1564.46 P5.2
NetA1_1: A1.1 U6.2 | length 134
  Top Layer w10: U6.2 1529.58,-1877.58 A1.1@1533,-1881
NetA2_1: A2.1 C9.1 C11.1 L3.2 | length 273.1
  Top Layer w20: A2.1 -1074,-1866 -956,-1866 L3.2 -888,-1864 ; C11.1@-887,-1895.44 C9.1
NetC7_2: C7.2 U4.4 | length 63.1
  Top Layer w10: C7.2 -121.16,-1442.6 U4.4
NetC9_2: C9.2 L4.2 U5.1 | length 473.4
  Top Layer w10: v1(-998,-1721) L4.2 ; C9.2@-883.56,-1786 U5.1 -751,-1764 v1(-752,-1763)
  Bottom Layer w10: v1(-998,-1721) -770,-1721 -752,-1739 v1(-752,-1763)
NetC10_2: C10.2 U5.7 | length 463.8
  Top Layer w10: U5.7 -430,-1836 -400,-1866 -99,-1866 -83.56,-1881.44 C10.2
NetC12_2: C12.2 U5.6 | length 188.4
  Top Layer w10: U5.6 -344,-1886 -328.56,-1901.44 C12.2
NetD1_2: D1.2 R16.1 | length 61
  Top Layer w10: D1.2 R16.1
NetD2_2: D2.2 D3.1 | length 560.5
  Top Layer w20: v1(-945,1849) -941,1853 D2.2 ; D3.1 -602.02,1673 v1(-584,1673)
  Bottom Layer w20: v1(-945,1849) -833,1849 -657,1673 v1(-584,1673)
NetD3_2: D3.2 D4.1 | length 180
  Top Layer w20: D4.1 D3.2
NetD4_2: D4.2 D5.1 | length 544.3
  Top Layer w20: v1(-1381,1709) D4.2 ; D5.1 -1014,1853 v1(-1012,1855)
  Bottom Layer w20: v1(-1381,1709) -1262,1709 -1116,1855 v1(-1012,1855)
NetD5_2: D5.2 D6.1 | length 344
  Top Layer w20: D6.1 -1598,1853 D5.2
NetD6_2: D6.2 D7.1 | length 563
  Top Layer w20: v3(-1867,1588) -1863,1588 D6.2 ; D7.1 -1515.92,1690.08 v3(-1481,1725)
  Bottom Layer w20: v3(-1867,1588) -1801,1654 -1552,1654 v3(-1481,1725)
NetD7_2: D7.2 D8.1 | length 219.8
  Top Layer w20: D7.2 -1703.08,1312.07 D8.1
NetD8_2: D8.2 D9.1 | length 560.5
  Top Layer w20: D9.1 v1(-1852,1354) ; v1(-1690,983) -1690,1045.02 D8.2
  Bottom Layer w20: v1(-1852,1354) -1852,1238 -1690,1076 v1(-1690,983)
NetD9_2: D9.2 D10.1 | length 191
  Top Layer w20: D10.1 D9.2
NetD10_2: D10.2 D11.1 | length 555.8
  Top Layer w20: v1(-1855,540) -1855,597.02 D10.2 ; v1(-1690,910) -1689,909 D11.1
  Bottom Layer w20: v1(-1855,540) -1855,641 -1690,806 v1(-1690,910)
NetD11_2: D11.2 D12.1 | length 191.8
  Top Layer w20: D12.1 D11.2
NetD12_2: D12.2 D13.1 | length 541.8
  Top Layer w20: v1(-1853,463) -1852,462 D13.1 ; v1(-1689,101) D12.2
  Bottom Layer w20: v1(-1853,463) -1853,359 -1689,195 v1(-1689,101)
NetD13_2: D13.2 D14.1 | length 191
  Top Layer w20: D14.1 D13.2
NetD14_2: D14.2 D15.1 | length 551.1
  Top Layer w20: v1(-1857,-344) -1857,-290.98 D14.2 ; v1(-1690,22) -1689,21 D15.1
  Bottom Layer w20: v1(-1857,-344) -1857,-256 -1690,-89 v1(-1690,22)
NetD15_2: D15.2 D16.1 | length 191.8
  Top Layer w20: D16.1 D15.2
NetD16_2: D16.2 D17.1 | length 558.2
  Top Layer w20: v1(-1853,-420) -1852,-421 D17.1 ; v1(-1693,-791) -1693,-733.18 D16.2
  Bottom Layer w20: v1(-1853,-420) -1853,-531 -1693,-691 v1(-1693,-791)
NetD17_2: D17.2 D18.1 | length 191
  Top Layer w20: D18.1 D17.2
NetD18_2: D18.2 D19.1 | length 550.2
  Top Layer w20: v1(-1854,-1232) -1854,-1173.98 D18.2 ; v1(-1691,-866) -1689,-868 D19.1
  Bottom Layer w20: v1(-1854,-1232) -1854,-1142 -1691,-979 v1(-1691,-866)
NetD19_2: D19.2 D20.1 | length 3407
  Top Layer w20: D19.2 D20.1@1718,-1172.98
NetD20_2: D20.2 D21.1 | length 543.4
  Top Layer w20: D20.2 1724,-921.02 v1(1724,-867) ; v1(1874,-1233) D21.1
  Bottom Layer w20: v1(1724,-867) 1724,-972 1874,-1122 v1(1874,-1233)
NetD21_2: D21.2 D22.1 | length 179.2
  Top Layer w20: D21.2 D22.1
NetD22_2: D22.2 D23.1 | length 540.2
  Top Layer w20: v1(1720,-800) 1721,-799 D23.1 ; v1(1873,-436) 1874,-437 D22.2
  Bottom Layer w20: v1(1720,-800) 1720,-707 1873,-554 v1(1873,-436)
NetD23_2: D23.2 D24.1 | length 179.2
  Top Layer w20: D23.2 D24.1
NetD24_2: D24.2 D25.1 | length 542.2
  Top Layer w20: D24.2 1724,-58.62 v1(1724,-4) ; D25.1 1874,-368 v1(1875,-369)
  Bottom Layer w20: v1(1724,-4) 1724,-112 1875,-263 v1(1875,-369)
NetD25_2: D25.2 D26.1 | length 179.2
  Top Layer w20: D25.2 D26.1
NetD26_2: D26.2 D27.1 | length 545.9
  Top Layer w20: D27.1 1721,64 v1(1722,63) ; D26.2 1877,372.58 v1(1877,429)
  Bottom Layer w20: v1(1722,63) 1722,177 1877,332 v1(1877,429)
NetD27_2: D27.2 D28.1 | length 179.2
  Top Layer w20: D27.2 D28.1
NetD28_2: D28.2 D29.1 | length 539.4
  Top Layer w20: D28.2 1723,802.78 v1(1723,855) ; v1(1874,491) D29.1
  Bottom Layer w20: v1(1723,855) 1723,749 1874,598 v1(1874,491)
NetD29_2: D29.2 D30.1 | length 179.2
  Top Layer w20: D29.2 D30.1
NetD30_2: D30.2 D31.1 | length 537.9
  Top Layer w20: v1(1721,926) D31.1 ; D30.2 1877,1234.98 v1(1877,1288)
  Bottom Layer w20: v1(1721,926) 1721,1036 1877,1192 v1(1877,1288)
NetD31_2: D31.2 D32.1 | length 239.8
  Top Layer w20: D31.2 D32.1@1721,1471.83
NetD32_2: D32.2 D33.1 | length 559.7
  Top Layer w20: v1(1505,1701) 1547.92,1658.08 D32.2 ; D33.1 1890,1576 v1(1890,1574)
  Bottom Layer w20: v1(1505,1701) 1559,1647 1817,1647 v1(1890,1574)
NetD33_2: D33.2 D34.1 | length 354.3
  Top Layer w20: D34.1 1613,1853 D33.2
NetD34_2: D34.2 D35.1 | length 547.7
  Top Layer w20: v1(1028,1850) 1031,1853 D34.2 ; D35.1 v1(1398,1709)
  Bottom Layer w20: v1(1028,1850) 1151,1850 1289,1712 1395,1712 v1(1398,1709)
NetD35_2: D35.2 D36.1 | length 183
  Top Layer w20: D36.1 D35.2
NetD36_2: D36.2 D37.1 | length 543.5
  Top Layer w20: v1(590,1711) 653.02,1711 D36.2 ; D37.1 956,1853 v1(957,1854)
  Bottom Layer w20: v1(590,1711) 715,1711 858,1854 v1(957,1854)
NetD38_1: D38.1 R12.1 | length 84.1
  Top Layer w20: R12.1@-8,1469.46 D38.1
NetD39_1: D39.1 R14.1 | length 61.8
  Top Layer w10: D39.1 -304,-1510.46 R14.1
NetD40_1: D40.1 R15.1 | length 102.5
  Top Layer w20: D40.1 679.54,741 R15.1
NetD41_2: D41.2 R25.2 | length 65.1
  Top Layer w10: D41.2@1816.46,-1646.07 R25.2
NetL5_1: L5.1 U8.5 | length 142.8
  Top Layer w20: U8.5 -1138,1078 L5.1@-1094.43,1121.57
NetP1_1: P1.1 U1.4 | length 219.1
  Top Layer w20: P1.1 0,1739.91 U1.4
NetP1_2: P1.2 U1.3 | length 174.4
  Top Layer w20: U1.3@196.85,1637.55 P1.2
NetQ1_1: Q1.1 R3.2 | length 288.2
  Top Layer w10: R3.2 948,-1659 959,-1648 959,-1445 945.6,-1431.6 Q1.1
NetQ2_1: Q2.1 R4.2 | length 191.4
  Top Layer w10: Q2.1 831,-1496.2 831,-1571.46 R4.2
NetR1_2: R1.2 U2.9 | length 242.4
  Top Layer w10: U2.9 684.63,-1536.37 705.54,-1557.28 R1.2
NetR2_2: R2.2 U2.26 | length 785.1
  Top Layer w10: v1(212,-1552) 247.31,-1516.68 U2.26 ; v1(699,-1706) 699,-1664.54 R2.2
  Bottom Layer w10: v1(212,-1552) 212,-1562 239,-1589 681,-1589 699,-1607 v1(699,-1706)
NetR7_1: R7.1 S1.1 | length 908.2
  Top Layer w10: S1.1@-1351,-1701 -1284,-1701 v1(-1282,-1699) ; v1(-514,-1684) -514,-1620.46 R7.1
  Bottom Layer w10: v1(-1282,-1699) -1276,-1693 -523,-1693 v1(-514,-1684)
NetR8_2: R8.2 U8.1 | length 124.9
  Top Layer w20: U8.1@-1415.93,1228.07 R8.2
NetU5_8: U5.8 Y1.1 | length 170.6
  Top Layer w10: U5.8 -322.37,-1786 Y1.1
OUT_LED: C14.2 D37.2 L5.2 P5.3 | length 2520.4
  Top Layer w20: L5.2 -897.57,1012.57 -860.41,975.41 C14.2 -497.41,975.41 v1(-497,975) ; v1(583,1847) 648.02,1847 D37.2
  Bottom Layer w20: v1(-497,975) -483,989 P5.3 -483,1783 -419,1847 v1(583,1847)
PWM_LED: P4.1 P5.4 R10.2 R11.1 U8.7 | length 7970.6
  Top Layer w10: P4.1 1058,-1785 v1(1059,-1786) ; v1(1554,-1263) 1765,-1263 1816.46,-1314.46 R11.1 1824,-1484 v1(1861,-1521)
  Top Layer w20: R10.2 -1417.46,1468.54 v1(-1417,1469) ; v1(-1319,1128) -1269,1178 U8.7
  Bottom Layer w10: v1(1059,-1786) 1065,-1780 1846,-1780 1861,-1765 v1(1861,-1521)
  Bottom Layer w20: v1(-1417,1469) -1415,1471 -1349,1471 ; v1(-1319,1128) -1330,1128 -1349,1147 -1349,1471 ; v1@1553,-1263 1553,609 1527,635 -496,635 -583,722 P5.4 -641,1471 -1349,1471
RTS: Q1.2 R4.1 U2.24 | length 927.8
  Top Layer w10: v1(262,-1470) 269.31,-1477.31 U2.24 ; v1(828,-1434) 853.2,-1434 Q1.2 ; R4.1 934,-1566.46 v1(934,-1540)
  Bottom Layer w10: v1(262,-1470) 792,-1470 v1(828,-1434) 919,-1434 934,-1449 v1(934,-1540)
SENSOR_VN: U6.8
SENSOR_VP: U6.5
SW_D0: P3.4 R17.2 U7.3 | length 3554.6
  Top Layer w10: P3.4 -1461,-1567 -1452,-1576 -1091,-1576 -1057,-1542 U7.3 -908,-1542 -887,-1521 -887,-1346 -805,-1264 1484,-1264 1605,-1385 1605,-1472 1587,-1490 R17.2
SW_D1: P3.5 R19.2 U7.6 | length 3351.9
  Top Layer w10: U7.6 v1(-754,-1542) -786,-1510 -786,-1379 -748,-1341 1095,-1341 1125,-1371 1125,-1485 1134,-1494 R19.2
  Bottom Layer w10: P3.5 -1561,-1631 -1534,-1658 -870,-1658 v1(-754,-1542)
SW_D2: P3.6 R20.2 U7.4 | length 3594
  Top Layer w10: P3.6 -1661,-1573 -1642,-1592 U7.4 -917,-1592 -860,-1535 -860,-1357 -792,-1289 1470,-1289 1550.46,-1369.46 R20.2
SW_D3: P3.7 R18.2 U7.5 | length 3624.5
  Top Layer w10: U7.5 v1(-754,-1592) -821,-1525 -821,-1365 -771,-1315 1106,-1315 1150,-1359 1150,-1420 1159,-1429 R18.2
  Bottom Layer w10: P3.7 -1761,-1646 -1733,-1674 -836,-1674 v1(-754,-1592)
SW_DATA: P3.2 U5.5 U7.2 | length 1357.3
  Top Layer w10: P3.2 -1261,-1554 -1255,-1560 -1105,-1560 -1090,-1545 -1090,-1506 -1076,-1492 v1(-1056,-1492) U7.2 ; v1(-1056,-1616) -1033,-1639 -688,-1639 -658,-1669 -658,-1905 -627,-1936 U5.5
  Bottom Layer w10: v1@-1056,-1613 v1(-1056,-1492)
SW_VT: D1.1 P3.3 R6.1 R7.2 U7.7 | length 1084.4
  Top Layer w10: v1(-755,-1492) U7.7 D1.1 -581.46,-1619 R7.2
  Bottom Layer w10: P3.3 -1361,-1615 -1335,-1641 -904,-1641 v1(-755,-1492)
USB-PWR-DM: U2.5 USB1.A7 USB1.B7 | length 221.5
  Top Layer w10: USB1.B7 404.47,-1683.53 410,-1678 438,-1678 443.84,-1683.84 ; U2.5 429.68,-1616.68 443.84,-1630.84 443.84,-1683.84 ; USB1.A7 443.84,-1683.84
USB-PWR-DP: U2.4 USB1.A6 USB1.B6 | length 361.7
  Top Layer w10: v1(410,-1789) 424.16,-1774.84 ; v1(410,-1645) U2.4 ; USB1.A6 424.16,-1774.84 ; USB1.B6 463.53,-1767.47 456.16,-1774.84 424.16,-1774.84
  Bottom Layer w10: v1(410,-1789) v1(410,-1645)
VDD_5V: C5.1 C16.1 L2.2 P2.1 R1.1 R13.1 R15.2 U2.7 U2.8 U3.1 U4.1 U4.3 USB1.A4 USB1.A9 USB1.B4 USB1.B9 | length 7347.8
  Top Layer w10: v1(162,-1375) 162,-1424 138.56,-1447.44 C16.1 90.16,-1442.6 U4.3 14.4,-1442.6 0,-1457 0,-1508 9.4,-1517.4 U4.1 42.06,-1646.06 57,-1661 326,-1661 333.61,-1668.61 USB1.A4 USB1.B9 345.42,-1805.42 356,-1816 518,-1816 522.58,-1811.42 USB1.B4 522.58,-1599.58 511.5,-1588.5 500,-1588.5 ; U2.7 500,-1588.5 ; v1(551,-1562) 507.44,-1562 U2.8 501.5,-1587 500,-1588.5 ; v1(772,-1548.07) 772.46,-1548.54 R1.1
  Top Layer w20: U3.1 387,1035 v1(388,1036) ; R15.2 878.54,740 R13.1 880.54,905.11 L2.2 958.43,983 1158,983 C5.1 1432,1008 P2.1
  Bottom Layer w10: v1(162,-1375) 163,-1375 187,-1351 1585,-1351 1634,-1302 ; v1(551,-1562) 564.93,-1548.07 v1(772,-1548.07)
  Bottom Layer w20: v1(388,1036) 388,812 405,795 v1(880,795) ; P2.1 1583,1017 1634,966 1634,-1302
pads on no net: A1. A2. D2.0 D3.0 D4.0 D5.0 D6.0 D7.0 D8.0 D9.0 D10.0 D11.0 D12.0 D13.0 D14.0 D15.0 D16.0 D17.0 D18.0 D19.0 D20.0 D21.0 D22.0 D23.0 D24.0 D25.0 D26.0 D27.0 D28.0 D29.0 D30.0 D31.0 D32.0 D33.0 D34.0 D35.0 D36.0 D37.0 U2.1 U2.2 U2.6 U2.10 U2.11 U2.12 U2.13 U2.14 U2.15 U2.16 U2.17 U2.18 U2.19 U2.20 U2.21 U2.22 U2.23 U2.27 U3.3 U3.7 U3.8 U6.26 U6.44 U6.45 U6.47 U6.48 U8.3 U8.6 USB1.0 USB1.A5 USB1.A8 USB1.B5 USB1.B8

## Polygon pours and split planes (outlines as drawn)
GND on Top Layer "GND" (solid, remove dead copper, pour order 4): -2016,-1204 -1998,-1222 2038,-1222 2038,-1753 1748,-2043 -1749,-2043 -1749,-2016 -2026,-1739 -2026,-1264
GND on Bottom Layer "GND" (solid, remove dead copper, pour order 4): -2016,-1200 -1998,-1218 2038,-1218 2038,-1749 1748,-2039 -1749,-2039 -1749,-2012 -2026,-1735 -2026,-1260

## Keep-outs
Keep-Out Layer:
  circle w0.5: c112281.14,49713.42 r68.9
  circle w0.5: c105706.33,49713.42 r68.9
  circle w1: c118059.57,55102.36 r68.9
  circle w1: c111484.76,55102.36 r68.9
  lines w0.1: -1952.47,-1591.98 ccw(c-1558.77,-1591.98) -1558.77,-1985.68 1590.84,-1985.68 ccw(c1590.84,-1591.98) 1984.54,-1591.98 1984.54,1557.63 ccw(c1590.84,1557.63) 1590.84,1951.33 -1558.77,1951.33 ccw(c-1558.77,1557.63) -1952.47,1557.63 -1952.47,-1591.98
  lines w0.5: 105706.33,49519.16 cw(c105706.33,48304.94) 106822.43,48783.13 ccw(c108993.74,49713.42) 111165.04,48783.13 cw(c112281.14,48304.94) 112281.14,49519.16 ccw(c112281.14,49713.42) 112281.14,49907.68 cw(c112281.14,51121.9) 111165.04,50643.71 ccw(c108993.74,49713.42) 106822.43,50643.71 cw(c105706.33,51121.9) 105706.33,49907.68 ccw(c105706.33,49713.42) 105706.33,49519.16
  lines w1: 111484.76,54908.1 cw(c111484.76,53693.88) 112600.86,54172.07 ccw(c114772.16,55102.36) 116943.47,54172.07 cw(c118059.57,53693.88) 118059.57,54908.1 ccw(c118059.57,55102.36) 118059.57,55296.62 cw(c118059.57,56510.84) 116943.47,56032.65 ccw(c114772.16,55102.36) 112600.86,56032.65 cw(c111484.76,56510.84) 111484.76,55296.62 ccw(c111484.76,55102.36) 111484.76,54908.1

## Other copper
Top Layer:
  pour cut-out: -1910,-1806 -1047,-1805.6 -1047,-1997 -1717,-1997 -1912,-1803
  pour cut-out: 1493.33,-1828.4 1494,-1839 1709,-1840 1923,-1839 1754,-1999 1493,-1999 1493,-1828.73
Bottom Layer:
  pour cut-out: -1910,-1806 -1047,-1805.6 -1047,-1997 -1717,-1997 -1912,-1803
  pour cut-out: 1493.33,-1828.4 1493,-1838.58 1709,-1840 1923,-1839 1754,-1999 1493,-1999 1493,-1828.73

## Silkscreen, mask and mechanical layers (free items; w line width, h text height)
Top Overlay:
  text "GND" at -756,1482 h39.37 r90
  text "mAO" at -359,1480 h39.37 r90
  text "CS_L" at -661,1479 h39.37 r90
  text "PWM" at -562,1479 h39.37 r90
  text "LEDO" at -461,1477 h39.37 r90
  text "300" at -242,1477 h39.37 r90
  text "300" at 23,1184 h39.37 r270
  text "GND" at 122,1184 h39.37 r270
  text "5V" at 1506,986 h39.37
  text "DR" at 1506,896 h39.37
  text "IC" at 1508,797 h39.37
  text "GND" at 1507,693 h39.37
  text "VT" at -1340,-1413 h39.37 r90
  text "D0" at -1437,-1415 h39.37 r90
  text "D1" at -1538,-1417 h39.37 r90
  text "DATA" at -1238,-1417 h39.37 r90
  text "GND" at -1838,-1418 h39.37 r90
  text "3v3" at -1140,-1419 h39.37 r90
  text "D3" at -1739,-1420 h39.37 r90
  text "D2" at -1635,-1420 h39.37 r90
  text "3v3" at 8,-1655 h39.37
  text "GND" at -335,-1657 h39.37
  text "PWM" at 862,-1803 h39.37
  text "GND" at 864,-1915 h39.37

## Text inside footprints (layer, text, board x,y; h text height)
C3: Top Overlay "+" at 1343.93,1263.21 h30 r90
C4: Top Overlay "+" at 652.93,1258.21 h30 r90
C5: Top Overlay "+" at 1072.07,982.79 h30 r270
C14: Top Overlay "+" at -751.93,1227.79 h30 r270
C15: Top Overlay "+" at -379.93,1225.79 h30 r270